# Altium PCB IMUBD-PCB-01.PcbDoc
Units mm, origin at the board's own origin, x right, y up, seen from the top; angles counter-clockwise.
Board outline 35.56 x 33.02 mm, 6 copper layers (Top Layer, MidLayer1, MidLayer2, MidLayer3, MidLayer4, Bottom Layer), stack 3.068 mm thick; 35 components, 24 nets, 116 pads, 27 vias.
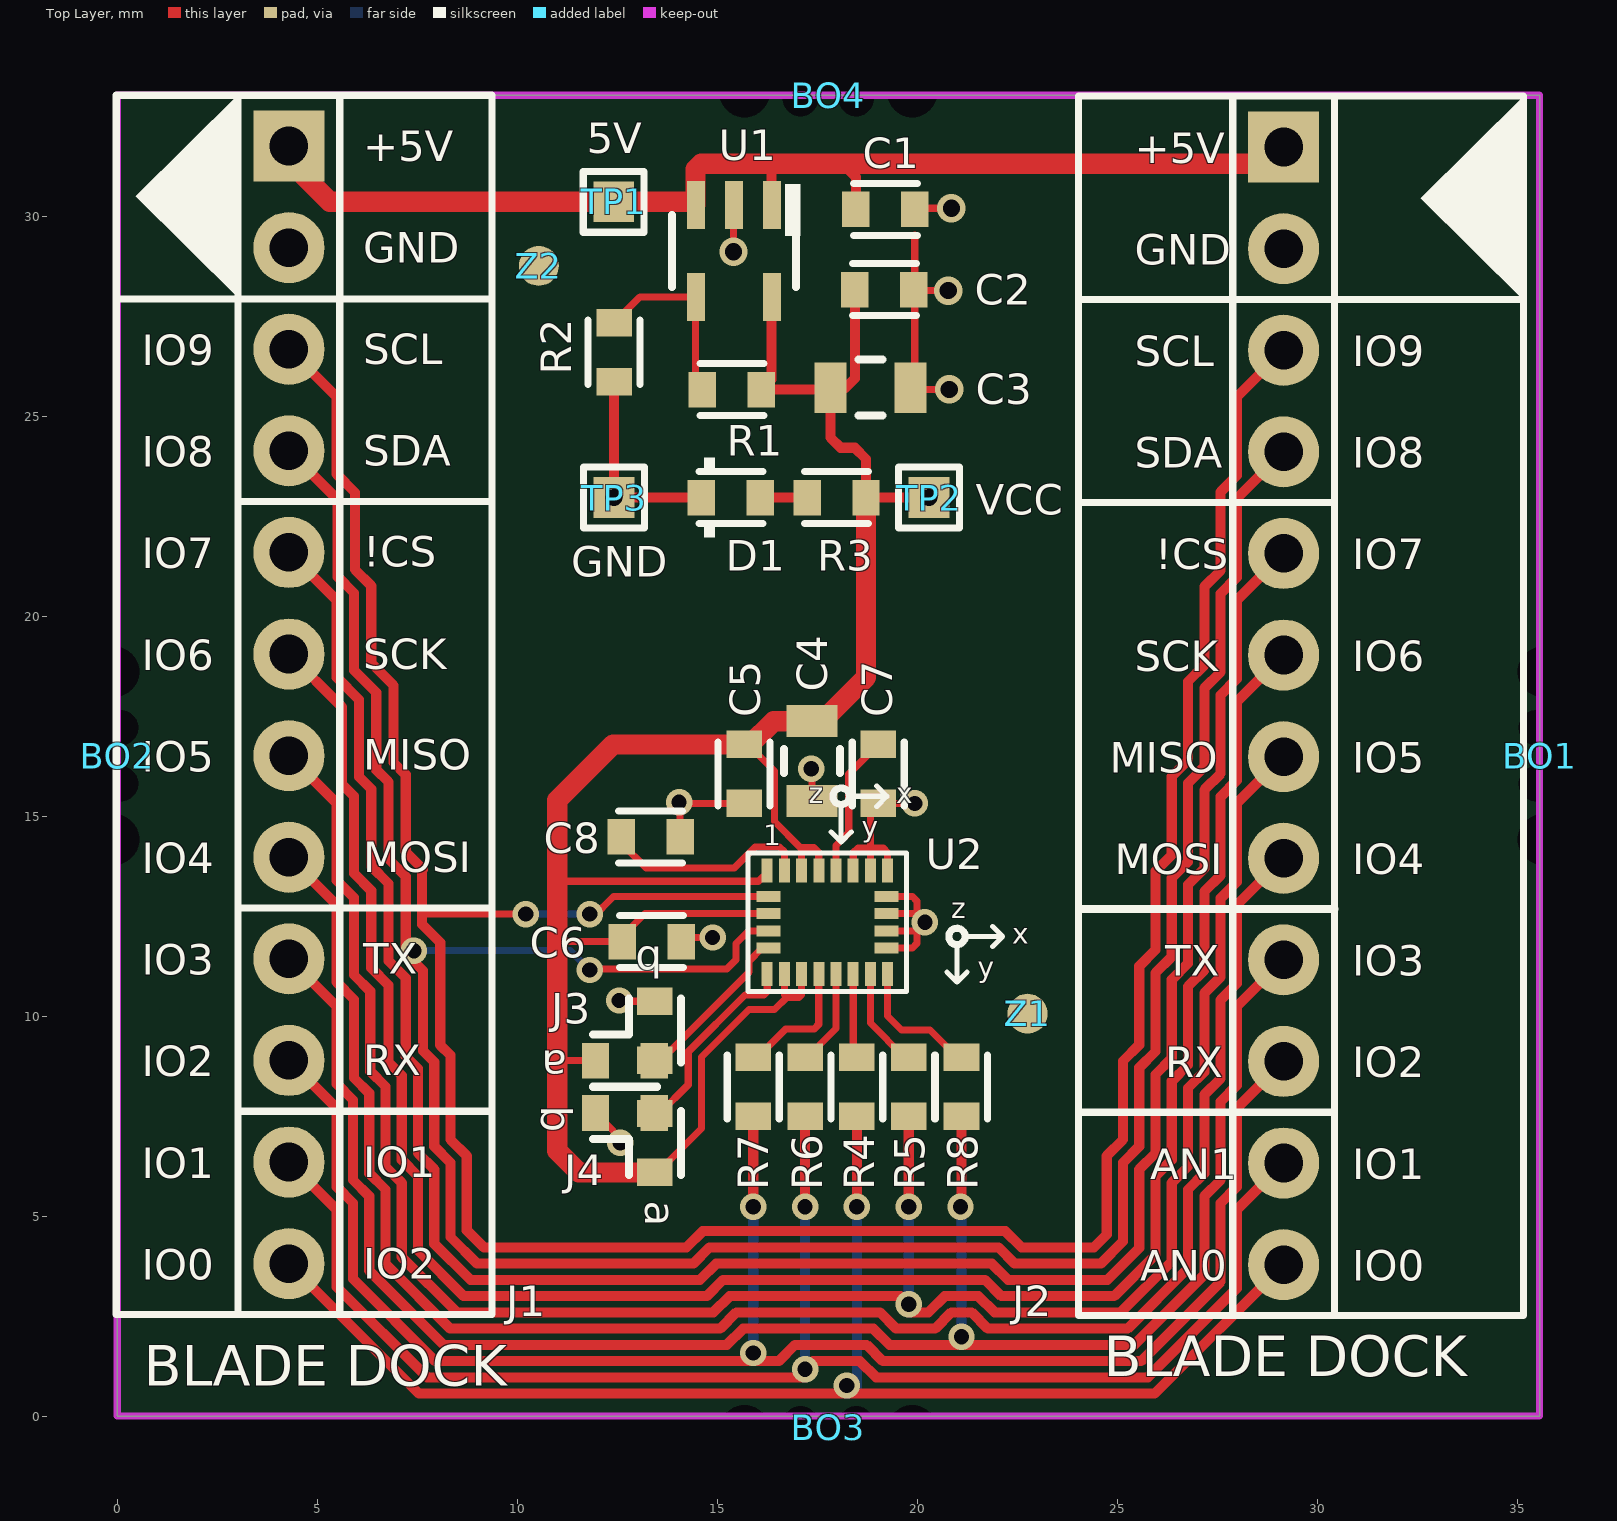
[diagram p0: Top Layer view]
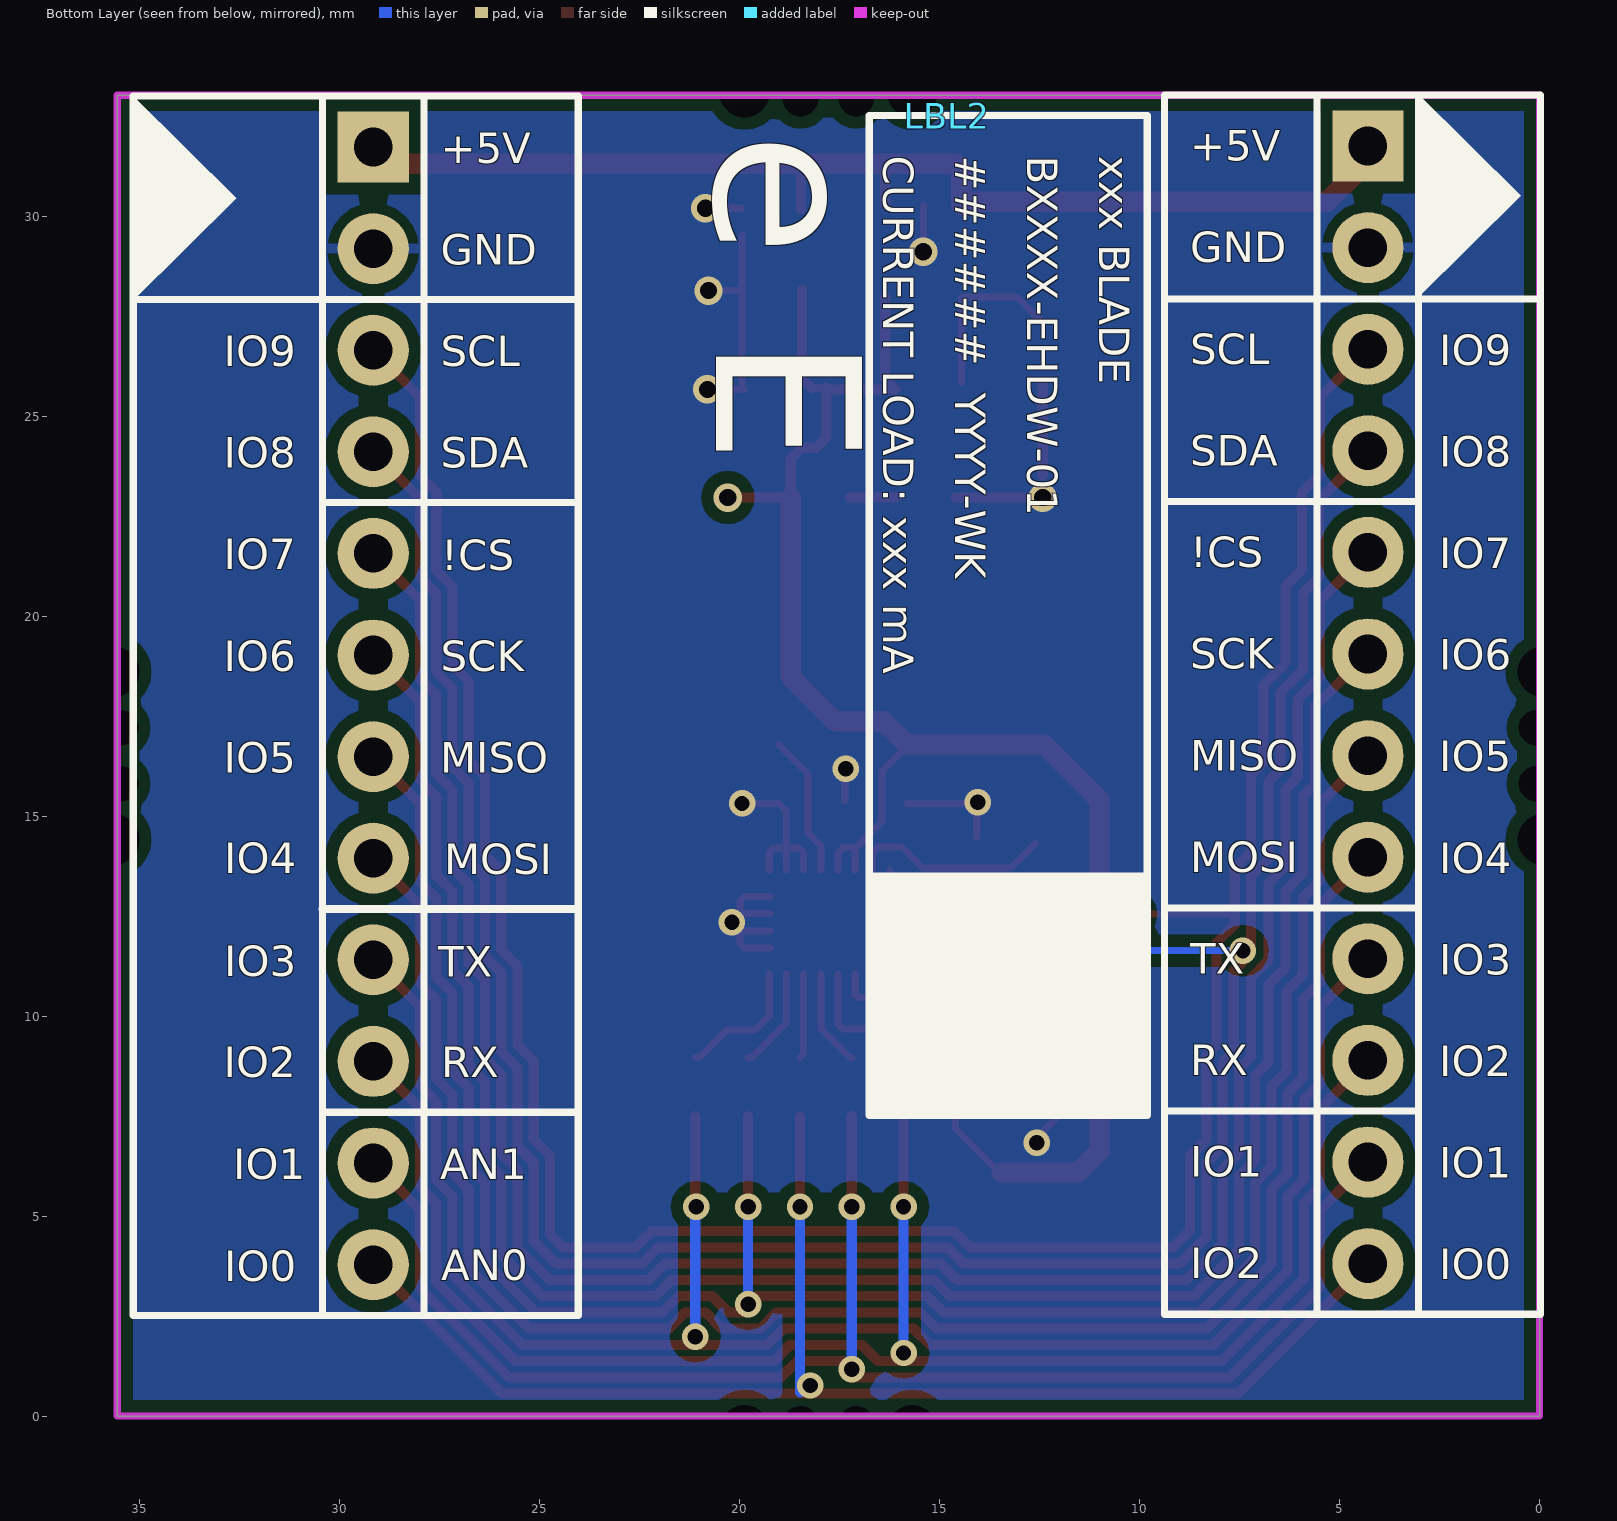
[diagram p1: Bottom Layer view, seen from below]
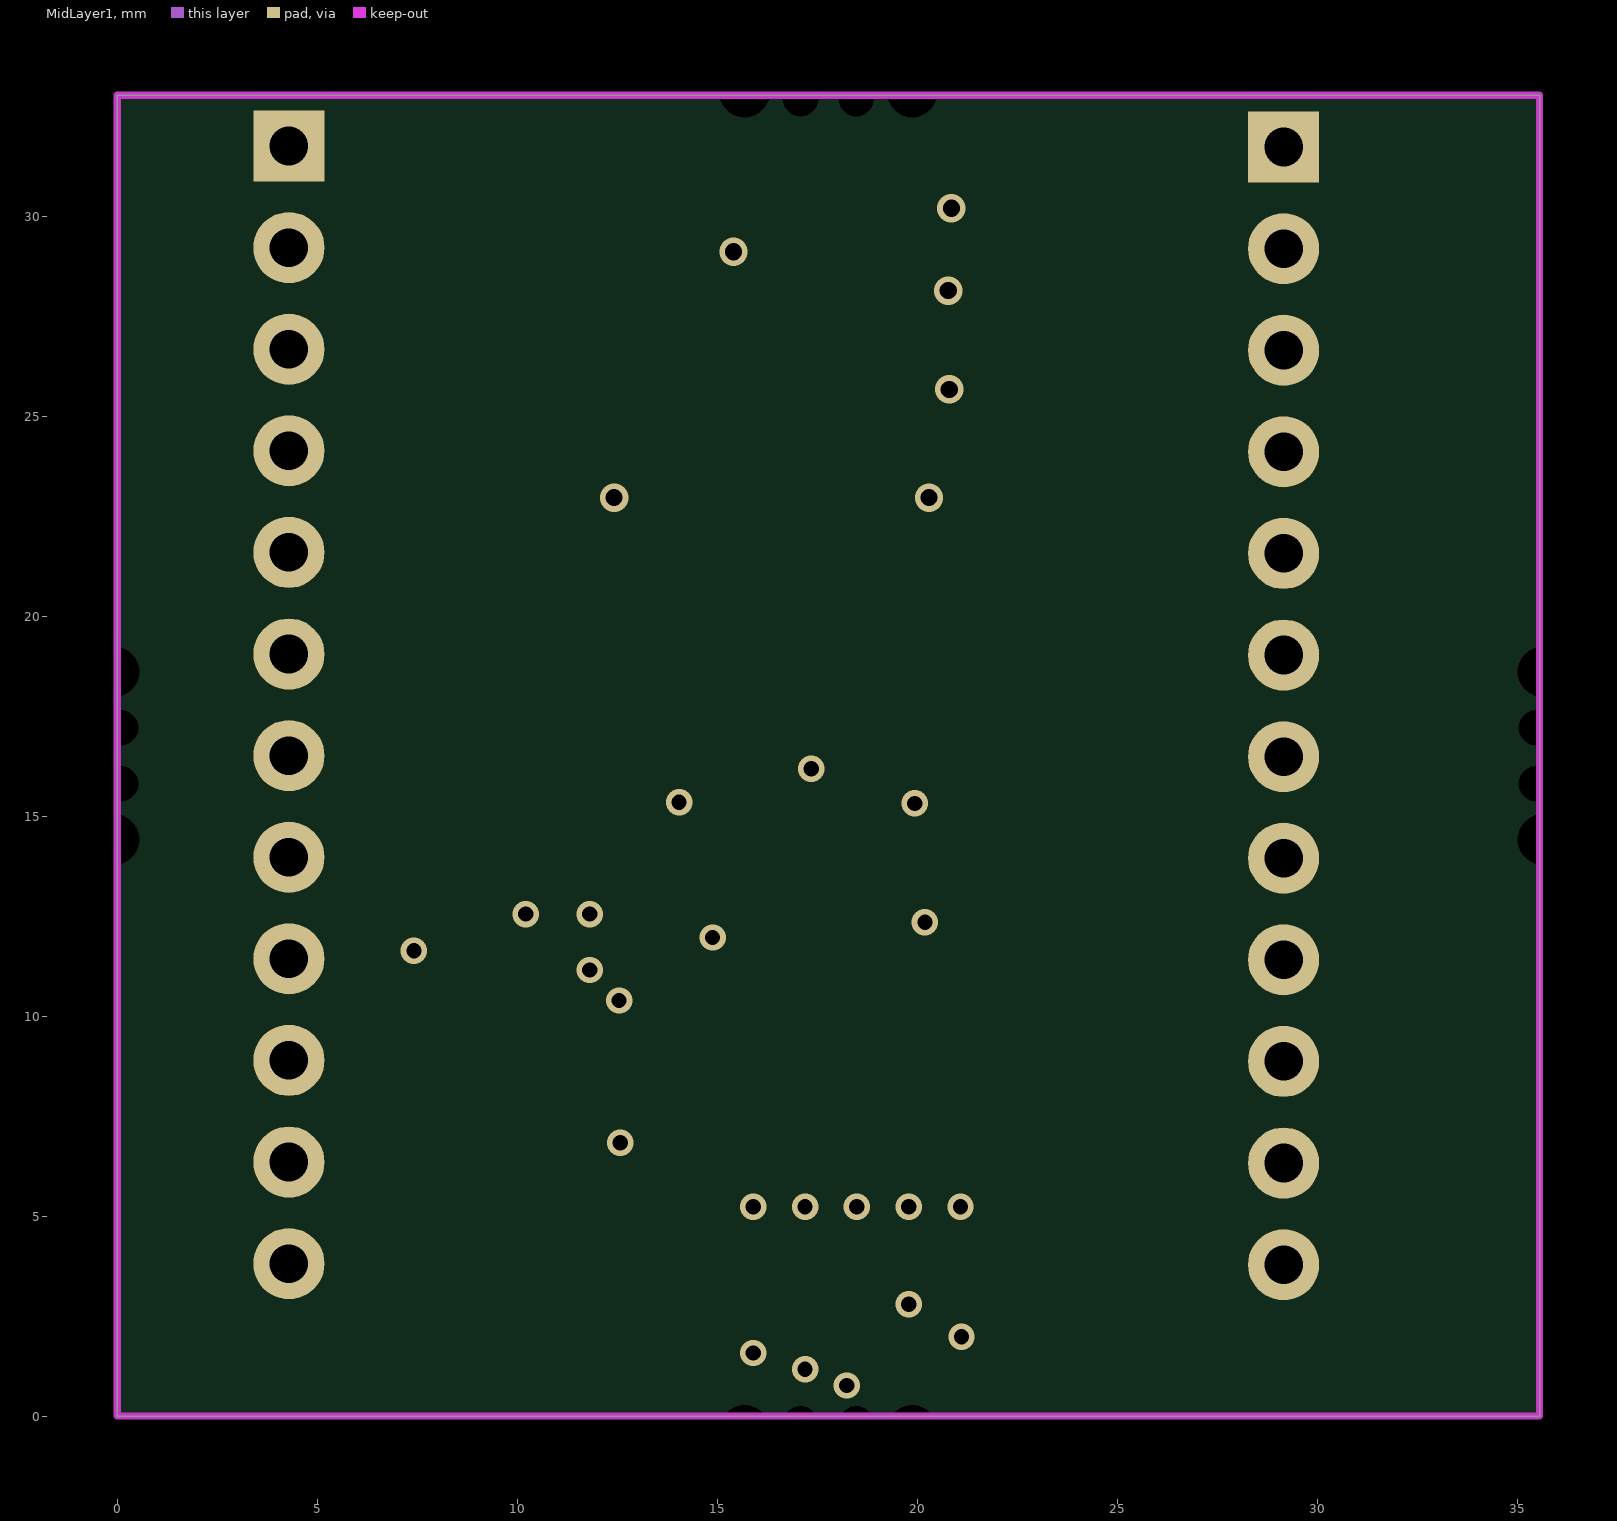
[diagram p2: MidLayer1]
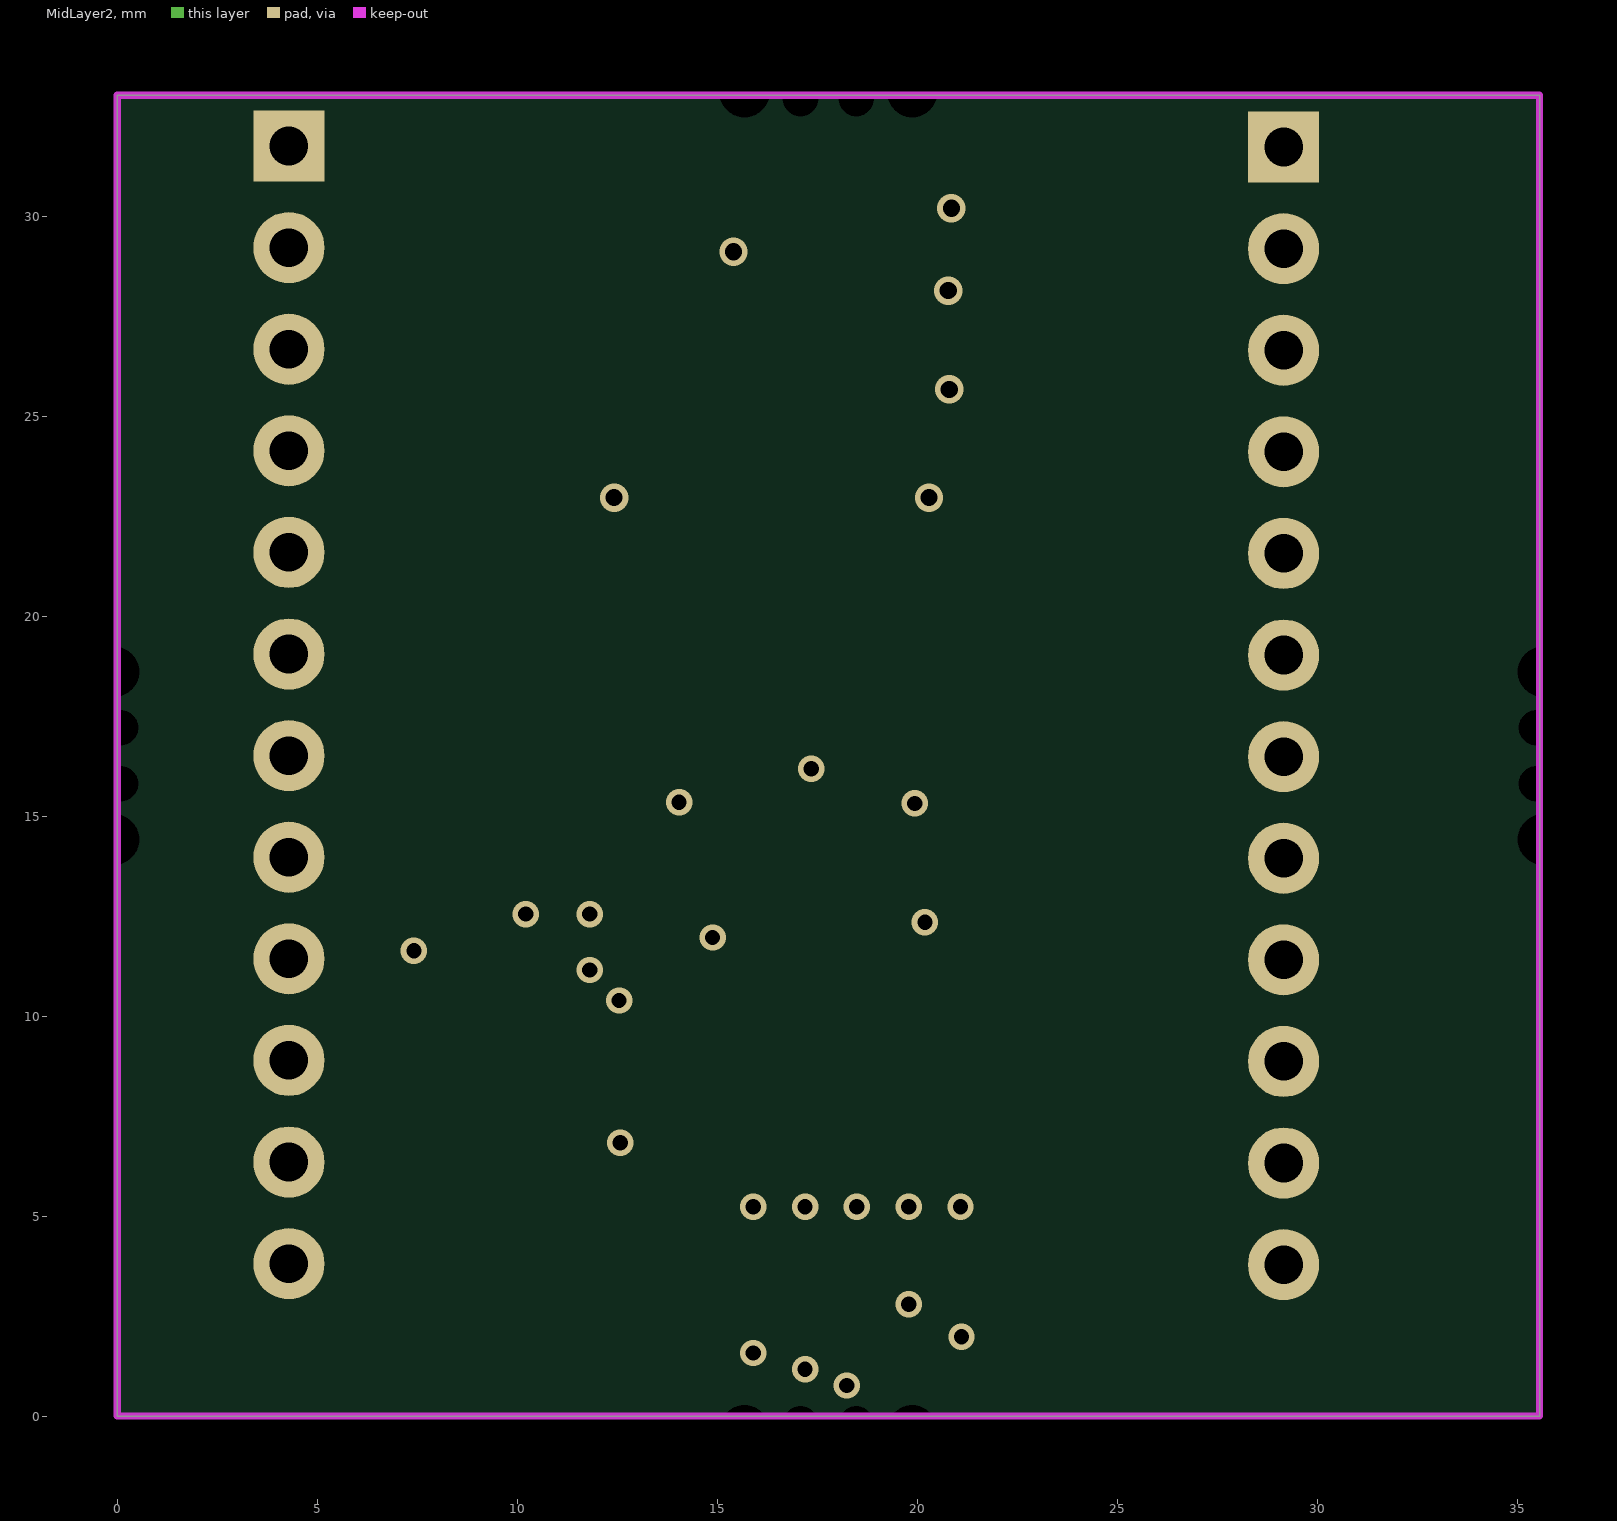
[diagram p3: MidLayer2]
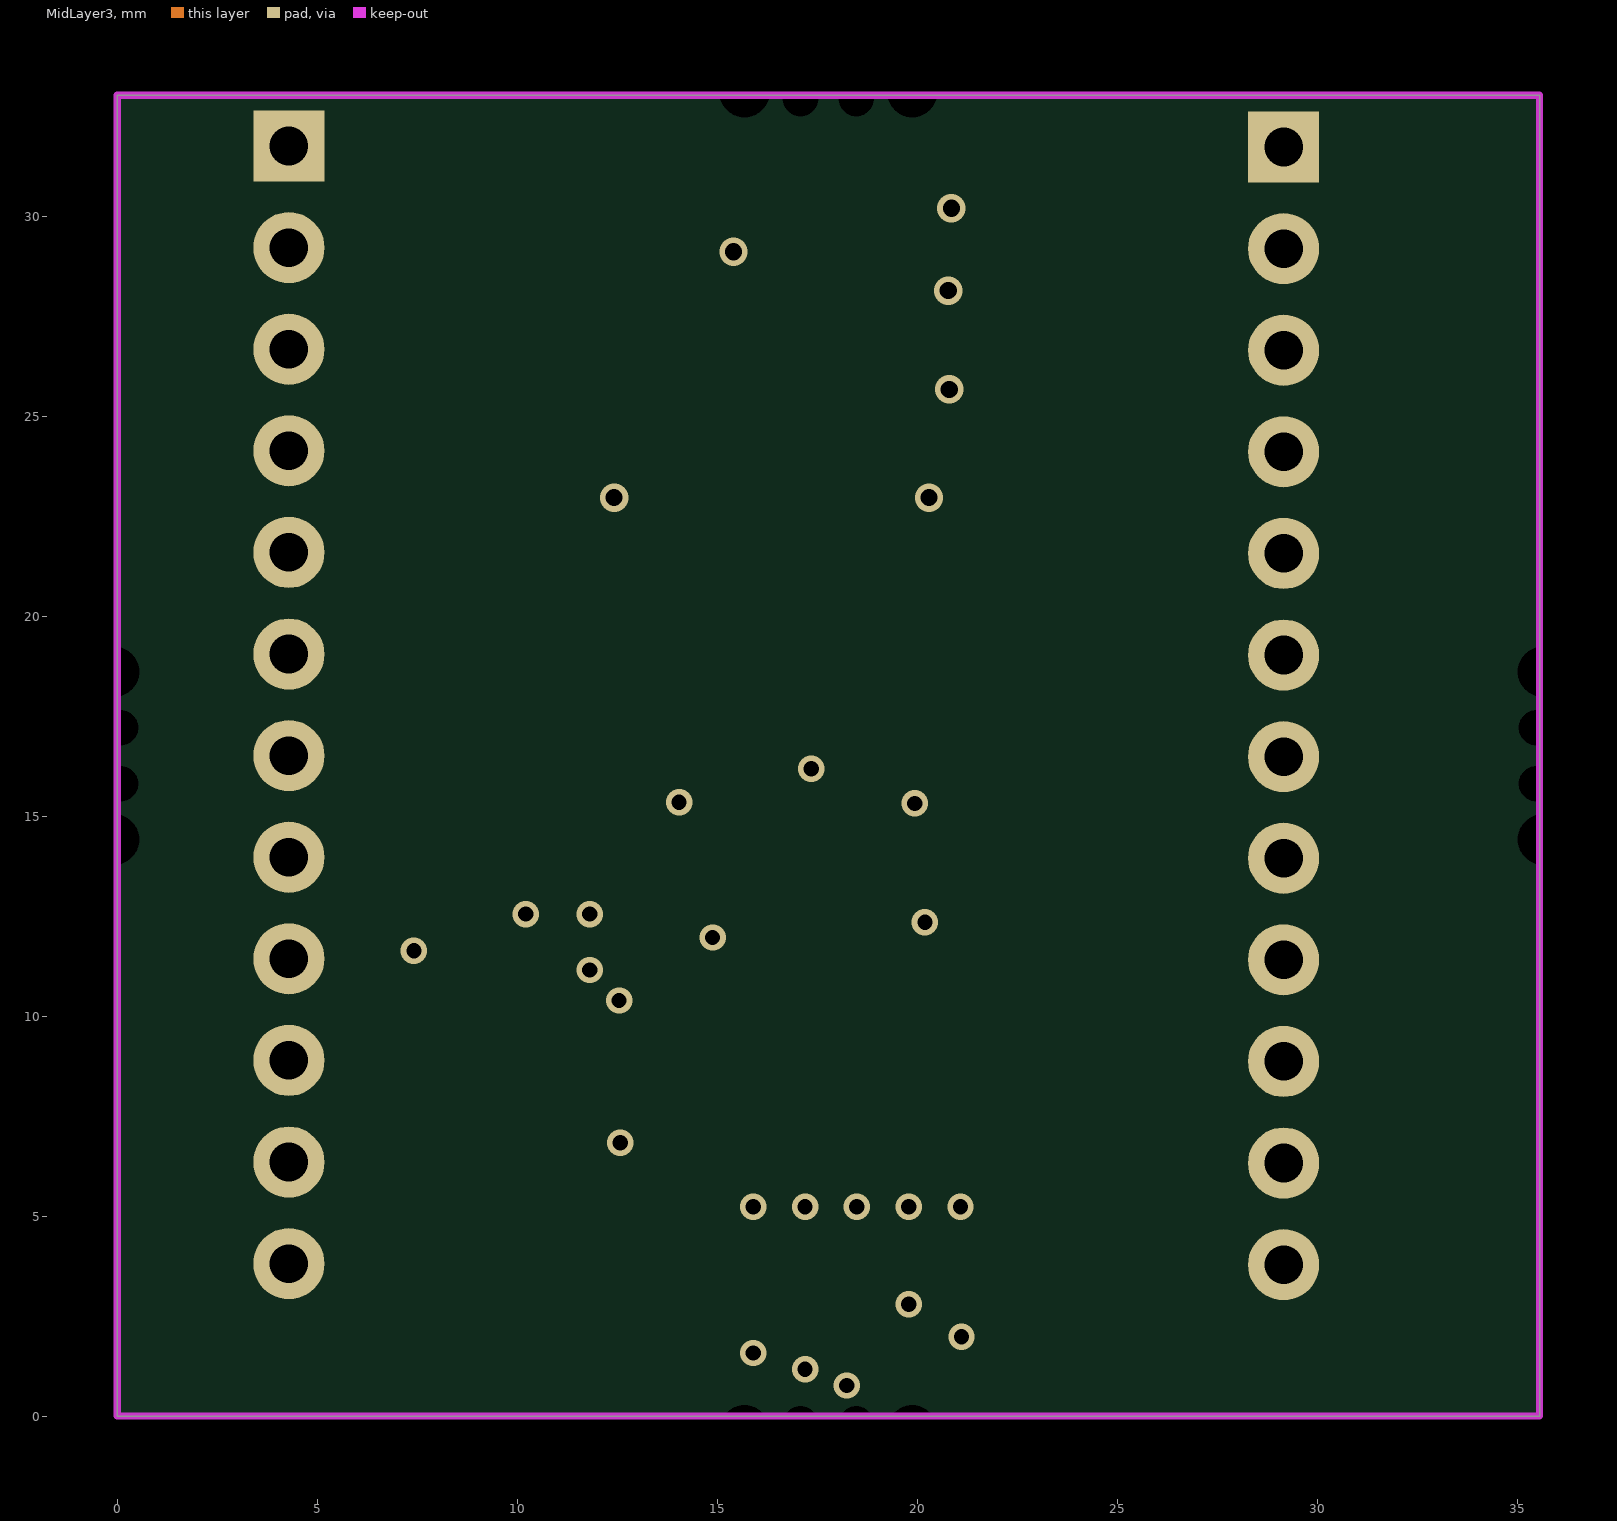
[diagram p4: MidLayer3]
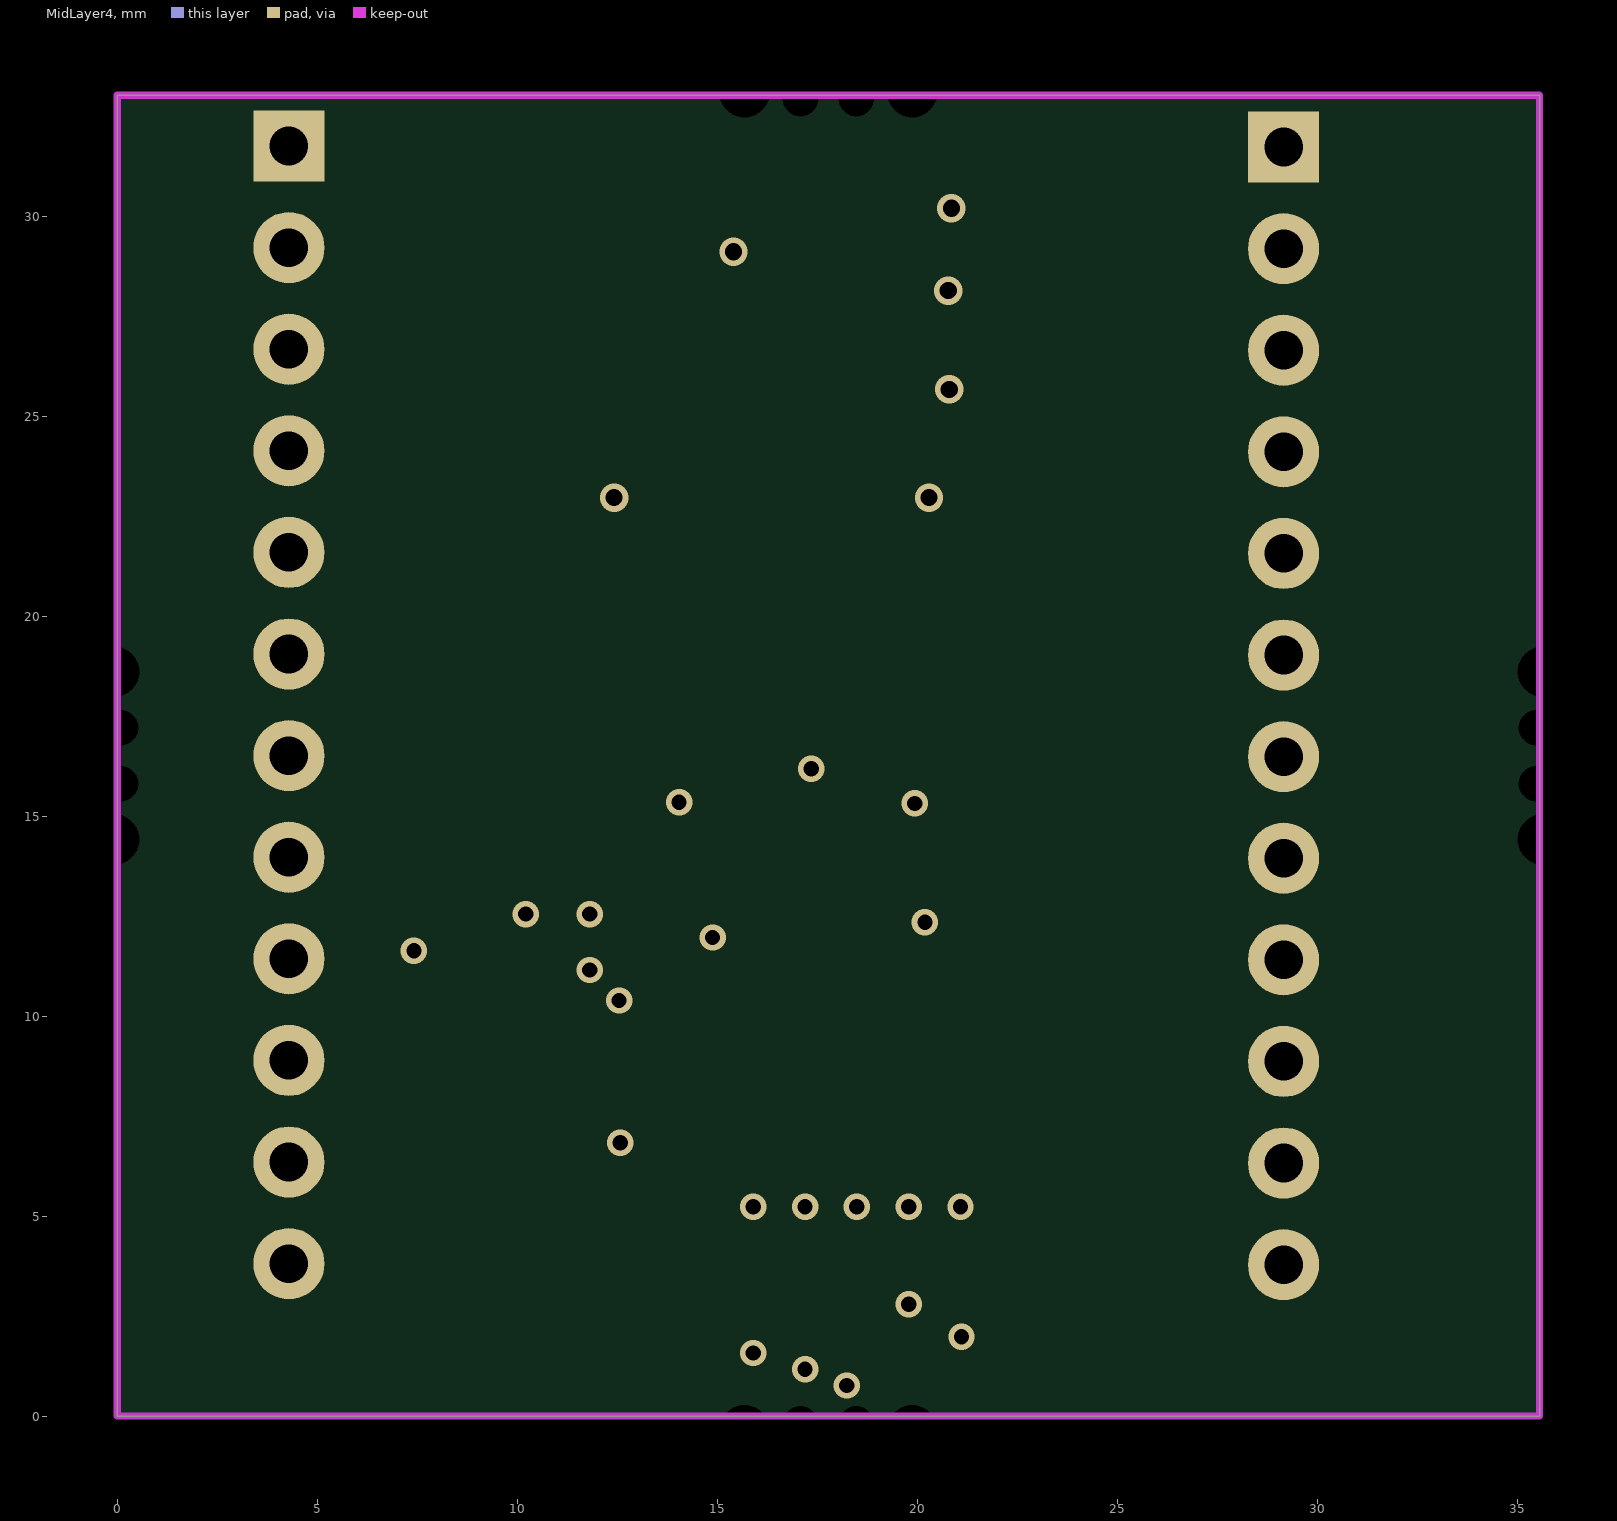
[diagram p5: MidLayer4]

## Layer stack, top to bottom
Top Solder: solder mask 0.0102, Solder Resist, Dk 3.5
Top Layer: signal copper 0.0356
Dielectric1: core 1.5748, FR-4, Dk 4.8
MidLayer1: signal copper 0.0356
Dielectric2: dielectric 0.32, FR-4, Dk 4.8
MidLayer2: signal copper 0.0356
Dielectric3: dielectric 0.32, FR-4, Dk 4.8
MidLayer3: signal copper 0.0356
Dielectric4: dielectric 0.32, FR-4, Dk 4.8
MidLayer4: signal copper 0.0356
Dielectric5: dielectric 0.32, FR-4, Dk 4.8
Bottom Layer: signal copper 0.0356
Bottom Solder: solder mask 0.0102, Solder Resist, Dk 3.5

## Board outline
0,0 0,33.02 35.56,33.02 35.56,0

## Design rules (kind name [scope] priority, off if disabled: settings)
Clearance "Clearance Polygon" [InPolygon] p1: gap=0.305 ignorepadtopadclearanceinfootprint=FALSE except(0: Arc-Hole Track-Hole SMDPad-Hole THPad-Hole Via-Hole Fill-Hole Poly-Hole Region-Hole Text-Hole)
Clearance [All] p2: gap=0.152 ignorepadtopadclearanceinfootprint=FALSE except(0: Arc-Hole Track-Hole SMDPad-Hole THPad-Hole Via-Hole Fill-Hole Poly-Hole Region-Hole Text-Hole)
FabricationTestPointUsage TestPointUsage [All] p1: valid=0 allowmultiple=FALSE
FabricationTestpoint Testpoint [All] p1: side=3 testpointundercomponent=TRUE minsize=1.016 maxsize=2.54 preferedsize=1.524 minholesize=0 maxholesize=1.016 preferedholesize=0.813 testpointgrid=0.025 allowsidetop=TRUE allowsidebottom=TRUE usegrid=TRUE gridtolerance=0
HoleSize [All] p1: absolutevalues=TRUE maxlimit=12.7 minlimit=0.254 maxpercent=80.000 minpercent=20.000
PolygonConnect "PolygonConnect Via" [All vs IsVia] p1: connectstyle=Direct reliefconductorwidth=0.254 reliefentries=4 polygonreliefangle="90 Angle" airgapwidth=0.254
PolygonConnect [All] p2: connectstyle=Relief reliefconductorwidth=0.254 reliefentries=4 polygonreliefangle="90 Angle" airgapwidth=0.254
RoutingVias [All] p1: holewidth=0.381 width=0.66 viastyle="Through Hole" minholewidth=0.254 minwidth=0.508 maxholewidth=5.08 maxwidth=12.7
SilkToSolderMaskClearance SilkscreenOverComponentPads [IsPad] p1: minsilkscreentomaskgap=0.254 clearancetoexposedcopper=TRUE
SolderMaskExpansion [All] p1: expansion=0.102
Width [All] p1: maxlimit=5.08 minlimit=0.152 preferedwidth=0.254 toplayer_prefwidth=0.178 midlayer1_maxwidth=0.254 midlayer2_maxwidth=0.254 midlayer3_maxwidth=0.254 midlayer4_maxwidth=0.254 minimp=50.000000 maximp=50.000000 favimp=50.000000
26 further rules are at their usual default settings.

## Components (designator, comment, footprint, x,y, rotation, side; value= is the part's Value field where it differs from the comment)
BO1 "BREAKOUT TAB" "BREAKOUT 4-HOLE 4MM" 35.56,16.51 r90 top
BO2 "BREAKOUT TAB" "BREAKOUT 4-HOLE 4MM" 0,16.51 r270 top
BO3 "BREAKOUT TAB" "BREAKOUT 4-HOLE 4MM" 17.78,-0.279 r0 top
BO4 "BREAKOUT TAB" "BREAKOUT 4-HOLE 4MM" 17.78,33.02 r180 top
C1 "1uF" 0603 19.203,30.165 r0 top
C2 "1uF" 0603 19.177,28.158 r0 top
C3 "10uF 0805" 0805 18.822,25.71 r0 top
C4 "10uF 0805 10V" 0805 17.374,16.383 r270 top
C5 "0.1uF" 0603 15.672,16.053 r270 top
C6 "0.1uF" 0603 13.36,11.862 r0 top
C7 "0.1uF" 0603 19.025,16.053 r270 top
C8 "0.1uF" 0603 13.335,14.478 r0 top
D1 "GREEN SMT" "0603 AK" 15.342,22.962 r180 top
J1 "BLADE Child" "HDR1X12 ENGENUICS CHILD" 4.293,17.78 r0 top locked
J2 "BLADE Parent" "HDR1X12 ENGENUICS PARENT" 29.159,17.755 r0 top locked
J3 "0Rb" "0603 SELECTOR" 12.7,9.627 r180 top
J4 "0Rb" "0603 SELECTOR" 12.7,6.833 r270 top
LBL1 "Active Layer Guide" "LABEL PCB ACTIVE LAYERS VERTICAL" -33.198,41.885 r0 top
LBL2 "PCB REV" "LABEL PCB REVISION BLADE" 14.808,32.512 r270 bottom
LBL4 "PCB TITLE BLOCK" "LABEL PCB TITLE BLOCK" 9.246,-13.741 r0 top
R1 "698k" 0603 15.367,25.659 r0 top
R2 "100k" 0603 12.421,26.595 r270 top
R3 "1.2k" 0603 17.983,22.962 r0 top
R4 "0R" 0603 18.491,8.23 r90 top
R5 "0R NNP" 0603 19.787,8.23 r90 top
R6 "0R" 0603 17.196,8.23 r90 top
R7 "0R NNP" 0603 15.9,8.23 r90 top
R8 "0R" 0603 21.107,8.23 r90 top
TP1 "5V" "TEST POINT SMT" 12.41,30.353 r90 top
TP2 "VCC" "TEST POINT SMT" 20.295,22.962 r270 top
TP3 "GND" "TEST POINT SMT" 12.421,22.962 r270 top
U1 "MCP1824" SOT23-5 15.418,29.124 r180 top
U2 "LSM9DS1" "LGA24 3.5 X 3MM LSM9DS1" 17.755,12.344 r0 top
Z1 "PCB" "FIDUCIAL PCB" 22.758,10.058 r0 top
Z2 "PCB" "FIDUCIAL PCB" 10.541,28.753 r0 top

## Footprints (in the part's own frame and the unit in brackets; to place one, negate y for a bottom-side part, rotate by r counter-clockwise, add the part's x,y. Pads: shape width x height; smd on the part's side, far side on the other; paste and mask are expansions set on the pad)
0603 [mil]
  rect 27x35 smd: 1(-29,0) 2(29,0)
  silkscreen extent -31,-26 31,26, body extent -33,-18 33,18, height 22
"0603 AK" [mil]
  rect 27x35 smd: A(-29,0) K(29,0)
  silkscreen extent -31,-39 31,39, body extent -33,-18 33,18, height 30
"0603 SELECTOR" [mil]
  rect 35x27 smd: 1(-29.26,28.74) 3(-29.26,-29.26)
  rect 27x35 smd: 1(-28.74,29.26) 2(29.26,29.26)
  silkscreen extent -55,-32 32,55, body extent -32,12 34,47, height 22
0805 [mm]
  rect 0.8x1.27 smd: 1(-0.99,-0.003) 2(1.011,-0.003)
  silkscreen extent -0.29,-0.7 0.31,0.7, body extent -1.05,-0.67 1.05,0.68, height 1.35
"BREAKOUT 4-HOLE 4MM" [mil]
  round 32 hole 50 unplated paste+0 mask+0: ""(-82.5,-3.25) ""(82.5,-3.25)
  round 32 hole 35 unplated paste+0 mask+0: ""(-27.5,3.25) ""(27.5,3.25)
"FIDUCIAL PCB" [mm]
  round 1 smd paste-2.54 mask+0.102: 1(0,0)
"HDR1X12 ENGENUICS CHILD" [mil]
  rect 70x70 hole 38: 1(0,550)
  round 70 hole 38: 2(0,450) 3(0,350) 4(0,250) 5(0,150) 6(0,50) 7(0,-50) 8(0,-150) 9(0,-250) 10(0,-350) 11(0,-450) 12(0,-550)
  silkscreen extent -170,-600 200,601, body extent -390,-600 13,600, height 95
"HDR1X12 ENGENUICS PARENT" [mil]
  rect 70x70 hole 38: 1(0,550)
  round 70 hole 38: 2(0,450) 3(0,350) 4(0,250) 5(0,150) 6(0,50) 7(0,-50) 8(0,-150) 9(0,-250) 10(0,-350) 11(0,-450) 12(0,-550)
  silkscreen extent -202,-600 236,600, body extent -8,-610 405,610, height 108
"LABEL PCB ACTIVE LAYERS VERTICAL" [mm]
"LABEL PCB REVISION BLADE" [mm]
  silkscreen extent 0,-1.95 25,5
"LABEL PCB TITLE BLOCK" [mm]
"LGA24 3.5 X 3MM LSM9DS1" [mm]
  rect 0.275x0.6 smd paste-0.04 mask+0.03: 1(-1.505,1.296) 6(-1.505,-1.294) 7(-1.075,-1.294) 8(-0.645,-1.294) 9(-0.215,-1.294) 10(0.215,-1.294) 11(0.645,-1.294) 12(1.075,-1.294) 13(1.505,-1.294) 18(1.505,1.296) 19(1.075,1.296) 20(0.645,1.296) 21(0.215,1.296) 22(-0.215,1.296) 23(-0.645,1.296) 24(-1.075,1.296)
  rect 0.6x0.275 smd paste-0.04 mask+0.03: 2(-1.475,0.645) 3(-1.475,0.215) 4(-1.475,-0.215) 5(-1.475,-0.645) 14(1.475,-0.645) 15(1.475,-0.215) 16(1.475,0.215) 17(1.475,0.645)
  silkscreen extent -1.98,-1.73 1.98,3.4, body extent -1.83,-1.58 1.83,1.58, height 1.28
SOT23-5 [mm]
  rect 0.45x1.2 smd: 1(-0.95,-1.15) 2(0,-1.15) 3(0.95,-1.15) 4(0.95,1.15) 5(-0.95,1.15)
  silkscreen extent -1.66,-1.67 1.55,0.9, body extent -1.55,-1.6 1.55,1.6, height 1.5
"TEST POINT SMT" [mil]
  rect 40x40 smd paste-3937.01: 1(0,0)
  silkscreen extent -30,-30 30,30

## Part data
C1 C2 C3 C4 C5 C6 C7 C8: library part "CAPACITOR NON-POLARIZED"
D1: library part "LED T1-3/4", "LED"
J1: library part "CONN ENGENUICS BLADE CHILD"
J2: library part "CONN ENGENUICS BLADE PARENT"
J3 J4: library part "SWITCH RESISTOR SELECTOR"
LBL1: library part "LABEL PCB ACTIVE LAYERS"
LBL2: library part "LABEL PCB REVISION"
LBL4: library part "LABEL PCB TITLE BLOCK"
R1 R2 R3 R4 R5 R6 R7 R8: library part RESISTOR
TP1 TP2 TP3: library part "TEST POINT SMT"
U1: library part "VREG MCP1824"
U2: library part "IC IMU ST LSM9DS1"
Z1 Z2: library part "FIDUCIAL PCB"

## Via types
v1: diameter 0.66, hole 0.381, Top Layer to Bottom Layer, tented both sides, 21 vias
v2: diameter 0.711, hole 0.432, Top Layer to Bottom Layer, tented both sides, 6 vias

## Nets (pads, with @x,y where several pads share a name; then routed paths per layer and width w, separated by ;. In a path a pad name is that pad's centre, name@x,y a point inside that pad or via, vN(x,y) a via of type N, cw(c..) or ccw(c..) an arc to the next point about the centre after c; other vN are vias at no path point)
!CS/IO7: J1.5 J2.5 | length 56.3
  Top Layer w0.254: J1.5 5.486,20.396 5.486,18.467 6.045,17.908 6.045,15.979 6.35,15.674 6.35,13.745 6.782,13.313 6.782,11.383 7.214,10.952 7.214,8.986 7.518,8.682 7.518,6.573 7.925,6.166 7.925,4.309 8.83,3.404 14.568,3.404 14.975,3.81 21.865,3.81 22.271,3.404 24.755,3.404 25.552,4.201 25.552,6.166 25.959,6.573 25.959,8.538 26.365,8.944 26.365,10.91 26.772,11.316 26.772,13.281 27.178,13.688 27.178,15.653 27.584,16.059 27.584,18.025 27.991,18.431 27.991,20.396 J2.5
+5V: C1.1 J1.1 J2.1 TP1.1 U1.1 U1.3 | length 28.2
  Top Layer w0.178: U1.3@14.381,30.353 U1.3@14.458,30.277
  Top Layer w0.254: U1.1@16.358,30.277 16.358,31.191 ; 18.187,31.257 18.466,30.978 C1.1
  Top Layer w0.508: J1.1@4.521,31.14 5.308,30.353 TP1.1 U1.3@14.381,30.353 ; U1.3@14.458,30.277 14.458,31.171 14.595,31.309 28.743,31.309 J2.1
AN0/IO0: J1.12 J2.12 R4.1 | length 34.5
  Top Layer w0.254: J1.12 7.544,0.559 v1@18.491,0.559 ; v1@18.491,0.584 v1@18.491,0.559 ; v1(18.491,5.232) R4.1 ; J2.12 25.933,0.559 v1@18.491,0.559
  Bottom Layer w0.254: v1@18.491,0.584 v1(18.491,5.232)
  other v1: 18.237,0.762
AN1/IO1: J1.11 J2.11 R6.1 | length 38.2
  Top Layer w0.254: J1.11 5.486,5.156 5.486,3.227 7.748,0.965 v1@17.196,0.965 ; v1(17.196,1.168) 17.399,1.372 18.566,1.372 18.972,0.965 25.765,0.965 27.991,3.191 27.991,5.156 J2.11 ; v1(17.196,5.232) R6.1
  Bottom Layer w0.254: v1(17.196,1.168) v1(17.196,5.232)
DEN_AG: R8.2 U2.13 | length 3.3
  Top Layer w0.178: U2.13 19.26,10.001 19.609,9.652 20.32,9.652 21.006,8.966 R8.2
DRDY_M: R7.2 U2.9 | length 3.2
  Top Layer w0.178: R7.2 16.002,8.966 16.713,9.677 17.424,9.677 17.54,9.793 U2.9
GND: C1.2 C2.2 C3.2 C4.2 C5.2 C6.2 C7.2 C8.2 D1.K J1.2 J2.2 J3.3 J4.3 R2.2 TP3.1 U1.2 U2.14 U2.15 U2.16 U2.17 U2.18 U2.19 U2.20 | length 26.5
  Top Layer w0.178: J4.3 12.395,7.137 ; v1@12.566,10.37 J3.3 ; J3.3@13.57,10.37 J3.3@13.577,10.363 ; C8.2 14.072,15.316 C5.2@15.824,15.316 ; C6.2@14.199,11.963 v1(14.884,11.963) ; v2(15.408,29.109) U1.2@15.408,30.277 ; v1(17.348,16.18) 17.37,16.158 C4.2 ; U2.20@18.4,13.65 18.4,14.082 18.517,14.199 18.83,14.199 ; U2.19@18.83,13.65 18.83,14.199 ; U2.14 19.878,11.699 19.99,11.811 v1@19.99,12.344 ; U2.15 v1@19.978,12.129 ; U2.16 v1@19.978,12.559 ; U2.17 19.878,12.989 19.99,12.878 v1@19.99,12.344 ; U2.18@19.26,13.65 19.26,14.091 19.152,14.199 18.83,14.199 ; C3.2@19.876,25.664 v2(20.804,25.664) ; C2.2@19.935,28.137 v2(20.779,28.137) ; v1(19.939,15.316) C7.2 18.83,15.121 18.83,14.199 ; C3.2@19.939,25.814 19.939,29.52 ; C1.2@19.969,30.195 v2(20.855,30.195) ; v1(20.193,12.344) v1@19.99,12.344
  Top Layer w0.254: v2(12.421,22.962) D1.K ; 12.421,23.511 R2.2
  other v1: 12.573,6.833 12.548,10.389 14.046,15.342
INT1_AG: R4.2 U2.11 | length 2.1
  Top Layer w0.178: U2.11 18.4,9.058 R4.2
INT2_AG: R5.2 U2.12 | length 2.5
  Top Layer w0.178: U2.12 18.83,9.822 19.685,8.966 R5.2
INT_M: R6.2 U2.10 | length 2.4
  Top Layer w0.178: R6.2 17.247,8.966 17.97,9.689 U2.10
MISO/IO5: J1.7 J2.7 R5.1 | length 53.1
  Top Layer w0.254: J1.7 5.486,15.316 5.486,13.387 5.918,12.955 5.918,11.026 6.325,10.619 6.325,8.618 6.706,8.237 6.706,6.236 7.112,5.83 7.112,3.972 8.493,2.591 14.905,2.591 15.311,2.997 19.583,2.997 v1(19.787,2.794) ; v1@19.787,2.591 20.28,2.591 20.687,2.997 21.528,2.997 21.935,2.591 25.092,2.591 26.365,3.864 26.365,5.83 26.772,6.236 26.772,8.201 27.178,8.608 27.178,10.573 27.584,10.979 27.584,12.945 27.991,13.351 27.991,15.316 J2.7 ; v1(19.787,5.232) R5.1
  Bottom Layer w0.254: v1(19.787,2.794) v1(19.787,5.232)
MOSI/IO4: J1.8 J2.8 | length 44.4
  Top Layer w0.254: J1.8 5.486,12.776 5.486,10.847 5.918,10.415 5.918,8.45 6.299,8.069 6.299,6.068 6.706,5.661 6.706,3.804 8.325,2.184 15.073,2.184 15.48,2.591 19.071,2.591 19.477,2.184 20.448,2.184 20.855,2.591 21.36,2.591 21.766,2.184 25.26,2.184 26.772,3.696 26.772,5.661 27.178,6.068 27.178,8.033 27.584,8.439 27.584,10.405 27.991,10.811 27.991,12.776 J2.8
NetC7_1: C7.1 U2.21 | length 3.6
  Top Layer w0.178: U2.21@17.97,13.65 17.97,14.261 18.288,14.58 18.288,16.053 C7.1
NetC8_1: C8.1 U2.24 | length 5.1
  Top Layer w0.178: C8.1@12.598,14.326 13.226,13.698 15.426,13.698 15.951,14.224 16.561,14.224 16.68,14.105 U2.24@16.68,13.65
NetD1_A: D1.A R3.1 | length 1.2
  Top Layer w0.254: D1.A R3.1
NetJ3_1: J3.1 U2.5 | length 4.2
  Top Layer w0.178: J3.1@13.43,8.883 13.582,8.883 15.799,11.1 15.799,11.378 16.12,11.699 U2.5
NetJ4_1: J4.1 U2.6 | length 5
  Top Layer w0.178: J4.1@13.43,7.576 13.57,7.576 14.275,8.28 14.275,9.109 15.694,10.528 16.167,10.528 16.25,10.611 U2.6
NetR1_1: R1.1 R2.1 U1.4 | length 4.4
  Top Layer w0.178: R2.1 13.065,27.977 14.458,27.977 14.458,27.332 R1.1@14.458,25.832
SCK/IO6: J1.6 J2.6 | length 52.2
  Top Layer w0.254: J1.6 5.613,17.729 5.613,15.8 5.918,15.495 5.918,13.566 6.35,13.134 6.35,11.205 6.782,10.773 6.782,8.843 7.112,8.513 7.112,6.404 7.518,5.998 7.518,4.14 8.662,2.997 14.736,2.997 15.143,3.404 21.697,3.404 22.103,2.997 24.923,2.997 25.959,4.033 25.959,5.998 26.365,6.404 26.365,8.37 26.772,8.776 26.772,10.741 27.178,11.148 27.178,13.113 27.584,13.519 27.584,15.485 27.991,15.891 27.991,17.856 J2.6
SCL/IO9: J1.3 J2.3 U2.2 | length 73.3
  Top Layer w0.178: 7.671,12.548 v1(10.211,12.548) ; v1(11.811,12.548) 11.887,12.471 12.405,12.989 U2.2
  Top Layer w0.254: J1.3 5.486,25.476 5.486,23.547 5.944,23.09 5.944,21.16 6.35,20.754 6.35,18.825 6.909,18.266 6.909,16.336 7.214,16.032 7.214,14.102 7.645,13.67 7.62,13.645 7.62,12.294 8.077,11.836 8.077,9.272 8.331,9.018 8.331,6.909 8.738,6.503 8.738,4.645 9.167,4.216 14.231,4.216 14.638,4.623 22.202,4.623 22.608,4.216 24.418,4.216 24.74,4.538 24.74,6.503 25.146,6.909 25.146,8.875 25.552,9.281 25.552,11.246 25.959,11.653 25.959,13.618 26.365,14.024 26.365,15.99 26.772,16.396 26.772,18.361 27.178,18.768 27.178,20.733 27.584,21.139 27.584,23.105 27.991,23.511 27.991,25.476 J2.3
  Bottom Layer w0.178: v1(10.211,12.548) v1(11.811,12.548)
SDA/IO8: J1.4 J2.4 U2.4 | length 70.1
  Top Layer w0.178: v1(11.811,11.151) 11.786,11.176 15.24,11.176 15.469,11.405 15.469,11.811 15.787,12.129 U2.4
  Top Layer w0.254: J1.4 5.512,22.911 5.512,20.981 5.918,20.575 5.918,18.646 6.477,18.087 6.477,16.158 6.782,15.853 6.782,13.923 7.214,13.492 7.214,11.562 7.645,11.13 7.645,9.129 7.925,8.85 7.925,6.741 8.331,6.335 8.331,4.477 8.998,3.81 14.4,3.81 14.806,4.216 22.033,4.216 22.44,3.81 24.587,3.81 25.146,4.369 25.146,6.335 25.552,6.741 25.552,8.706 25.959,9.113 25.959,11.078 26.365,11.484 26.365,13.45 26.772,13.856 26.772,15.821 27.178,16.228 27.178,18.193 27.584,18.599 27.584,20.565 27.991,20.971 27.991,22.936 J2.4
  Bottom Layer w0.178: v1(7.417,11.633) 11.328,11.633 v1(11.811,11.151)
URX/IO2: J1.10 J2.10 R7.1 | length 41.9
  Top Layer w0.254: J1.10 5.486,7.696 5.486,5.731 5.893,5.325 5.893,3.431 7.952,1.372 16.537,1.372 16.943,1.778 18.734,1.778 19.141,1.372 25.597,1.372 27.584,3.359 27.584,5.325 27.991,5.731 27.991,7.696 J2.10 ; v1(15.9,5.232) R7.1
  Bottom Layer w0.254: v1(15.9,1.575) v1(15.9,5.232)
UTX/IO3: J1.9 J2.9 R8.1 | length 45.5
  Top Layer w0.254: J1.9 5.486,10.236 5.486,8.307 5.893,7.9 5.893,5.899 6.299,5.493 6.299,3.635 8.157,1.778 15.241,1.778 15.648,2.184 18.903,2.184 19.309,1.778 25.428,1.778 27.178,3.528 27.178,5.493 27.584,5.899 27.584,7.865 27.991,8.271 27.991,10.236 J2.9 ; v1@21.107,5.258 R8.1
  Bottom Layer w0.254: v1(21.107,1.981) v1@21.107,5.232
  other v1: 21.082,5.232
VCC: C2.1 C3.1 C4.1 C5.1 C6.1 J3.2 J4.2 R1.2 R3.2 TP2.1 U1.5 U2.1 U2.3 U2.7 U2.8 U2.22 U2.23 | length 61.8
  Top Layer w0.178: 10.998,13.32 11.047,13.368 16.035,13.368 16.25,13.583 U2.1@16.25,13.65 ; 11.005,8.883 J3.2 ; 11.024,11.862 C6.1 ; C6.1@12.624,11.989 13.194,12.559 U2.3 ; J4.2 13.506,6.089 14.605,7.188 14.605,8.972 15.793,10.16 16.434,10.16 16.739,10.465 ; C5.1 15.773,16.789 16.434,16.129 16.434,14.859 17.084,14.209 17.11,14.209 ; U2.7 16.68,10.524 16.739,10.465 ; U2.8 17.11,10.531 17.043,10.465 16.739,10.465 ; U2.23@17.11,13.65 17.11,14.209 ; U2.22@17.54,13.65 17.54,14.083 17.414,14.209 17.11,14.209 ; C3.1 C3.1@18.209,25.707
  Top Layer w0.254: U1.5@16.358,27.977 16.358,25.913 R1.2 17.785,25.659 C3.1 17.832,24.459 18.085,24.206 18.44,24.206 18.72,23.927 R3.2 v2(20.295,22.962) 19.603,22.962 ; C3.1@18.209,25.707 18.441,25.939 C2.1
  Top Layer w0.508: J4.2 11.538,6.089 10.998,6.629 10.998,13.32 10.998,15.392 12.395,16.789 C5.1 ; C5.1@15.773,16.789 15.824,16.789 16.407,17.373 C4.1 17.627,17.373 18.72,18.466 R3.2
pads on no net: BO1. BO2. BO3. BO4. Z1.1 Z2.1

## Polygon pours and split planes (outlines as drawn)
GND on Bottom Layer "Top Layer-No Net" (solid, remove dead copper, pour order 2): 0,33.02 35.56,33.02 35.56,0 0,0

## Keep-outs
Keep-Out Layer:
  the board outline again, w0.178

## Other copper
Top Layer:
  pour cut-out: 17.869,30.863 19.599,30.887 19.599,29.464 17.869,29.466
  pour cut-out: 17.844,28.212 18.176,28.21 19.787,28.212 19.705,24.818 18.221,24.818 17.844,26.815
  pour cut-out: 11.722,27.929 13.119,27.929 13.119,25.262 11.722,25.262
  pour cut-out: 14.034,24.961 16.701,24.961 17.178,24.818 17.178,26.596 14.036,26.61

## Silkscreen, mask and mechanical layers (free items; w line width, h text height)
Top Overlay:
  circle w0.178: c20.994,11.989 r0.205
  lines w0.127: 20.74,11.1 20.994,10.846 ; 20.994,11.784 20.994,10.846 ; 21.199,11.989 22.137,11.989 ; 21.248,11.1 20.994,10.846 ; 21.883,11.735 22.137,11.989 ; 21.883,12.243 22.137,11.989
  text "z" at 20.853,12.446 h0.51
  text "x" at 22.377,11.811 h0.51
  text "y" at 21.514,10.973 h0.51
  text "BLADE DOCK" at 0.66,0.762 h1.02
Bottom Overlay:
  text "e" at 21.819,32.08 h6.35 r90
  text "E" at 21.793,26.975 h6.35 r90
Mechanical 1:
  the board outline again, w0.178
Mechanical 2:
  text "IMU BLADE BOARD" at 6.147,-8.28 h1.02
  text "IMUBD-PCB" at 6.147,-11.252 h1.02
  text "01" at 6.147,-14.249 h1.02
  text "2019-02-18" at 6.147,-17.272 h1.02
  text "JRL" at 6.147,-20.269 h1.02

## Dimensions
0,33.02 to 35.56,33.02 on Mechanical 5
35.56,33.02 to 35.56,0 on Mechanical 5

## Text inside footprints (layer, text, board x,y; h text height)
J1: Top Overlay "IO9" at 0.61,26.27 h0.76; Top Overlay "IO8" at 0.61,23.73 h0.76; Top Overlay "IO7" at 0.61,21.19 h0.76; Top Overlay "IO6" at 0.61,18.65 h0.76; Top Overlay "IO5" at 0.61,16.11 h0.76; Top Overlay "IO4" at 0.61,13.57 h0.76; Top Overlay "IO3" at 0.61,11.03 h0.76; Top Overlay "IO2" at 0.61,8.49 h0.76; Top Overlay "IO1" at 0.61,5.95 h0.76; Top Overlay "IO0" at 0.61,3.41 h0.76; Top Overlay "MISO" at 6.147,16.154 h0.76; Top Overlay "MOSI" at 6.147,13.595 h0.76; Top Overlay "SDA" at 6.147,23.755 h0.76; Top Overlay "SCL" at 6.147,26.295 h0.76; Top Overlay "+5V" at 6.147,31.375 h0.76; Top Overlay "GND" at 6.147,28.835 h0.76; Top Overlay "SCK" at 6.147,18.675 h0.76; Top Overlay "IO2" at 6.147,3.435 h0.76; Top Overlay "IO1" at 6.147,5.975 h0.76; Top Overlay "!CS" at 6.147,21.234 h0.76; Top Overlay "RX" at 6.147,8.515 h0.76; Top Overlay "TX" at 6.147,11.055 h0.76; Bottom Overlay "TX" at 8.738,11.06 h0.76; Bottom Overlay "RX" at 8.738,8.52 h0.76; Bottom Overlay "!CS" at 8.738,21.22 h0.76; Bottom Overlay "IO1" at 8.738,5.98 h0.76; Bottom Overlay "IO2" at 8.738,3.44 h0.76; Bottom Overlay "SCK" at 8.738,18.68 h0.76; Bottom Overlay "GND" at 8.738,28.84 h0.76; Bottom Overlay "+5V" at 8.738,31.38 h0.76; Bottom Overlay "SCL" at 8.738,26.3 h0.76; Bottom Overlay "SDA" at 8.738,23.76 h0.76; Bottom Overlay "MOSI" at 8.738,13.6 h0.76; Bottom Overlay "MISO" at 8.738,16.129 h0.76; Bottom Overlay "IO0" at 2.515,3.415 h0.76; Bottom Overlay "IO1" at 2.515,5.955 h0.76; Bottom Overlay "IO2" at 2.515,8.495 h0.76; Bottom Overlay "IO3" at 2.515,11.035 h0.76; Bottom Overlay "IO4" at 2.515,13.575 h0.76; Bottom Overlay "IO5" at 2.515,16.115 h0.76; Bottom Overlay "IO6" at 2.515,18.655 h0.76; Bottom Overlay "IO7" at 2.515,21.195 h0.76; Bottom Overlay "IO8" at 2.515,23.735 h0.76; Bottom Overlay "IO9" at 2.515,26.275 h0.76
J2: Top Overlay "IO9" at 30.871,26.245 h0.76; Top Overlay "IO8" at 30.871,23.705 h0.76; Top Overlay "IO7" at 30.871,21.165 h0.76; Top Overlay "IO6" at 30.871,18.625 h0.76; Top Overlay "IO5" at 30.871,16.085 h0.76; Top Overlay "IO4" at 30.871,13.545 h0.76; Top Overlay "IO3" at 30.871,11.005 h0.76; Top Overlay "IO2" at 30.871,8.465 h0.76; Top Overlay "IO1" at 30.871,5.925 h0.76; Top Overlay "IO0" at 30.871,3.385 h0.76; Top Overlay "+5V" at 25.444,31.325 h0.76; Top Overlay "GND" at 25.444,28.785 h0.76; Top Overlay "SCL" at 25.444,26.245 h0.76; Top Overlay "SDA" at 25.444,23.705 h0.76; Top Overlay "!CS" at 25.952,21.165 h0.76; Top Overlay "SCK" at 25.444,18.625 h0.76; Top Overlay "MISO" at 24.809,16.085 h0.76; Top Overlay "MOSI" at 24.936,13.545 h0.76; Top Overlay "TX" at 26.206,11.005 h0.76; Top Overlay "RX" at 26.206,8.465 h0.76; Top Overlay "AN1" at 25.825,5.925 h0.76; Top Overlay "AN0" at 25.571,3.385 h0.76; Top Overlay "BLADE DOCK" at 24.659,1 h1.02; Bottom Overlay "AN0" at 27.459,3.4 h0.76; Bottom Overlay "AN1" at 27.484,5.925 h0.76; Bottom Overlay "RX" at 27.459,8.475 h0.76; Bottom Overlay "TX" at 27.531,10.98 h0.76; Bottom Overlay "MOSI" at 27.384,13.55 h0.76; Bottom Overlay "MISO" at 27.484,16.085 h0.76; Bottom Overlay "SCK" at 27.469,18.625 h0.76; Bottom Overlay "!CS" at 27.459,21.15 h0.76; Bottom Overlay "SDA" at 27.469,23.705 h0.76; Bottom Overlay "SCL" at 27.469,26.245 h0.76; Bottom Overlay "GND" at 27.469,28.785 h0.76; Bottom Overlay "+5V" at 27.469,31.325 h0.76; Bottom Overlay "IO0" at 32.884,3.375 h0.76; Bottom Overlay "IO1" at 32.659,5.925 h0.76; Bottom Overlay "IO2" at 32.896,8.465 h0.76; Bottom Overlay "IO3" at 32.884,11 h0.76; Bottom Overlay "IO4" at 32.884,13.575 h0.76; Bottom Overlay "IO5" at 32.896,16.085 h0.76; Bottom Overlay "IO6" at 32.896,18.625 h0.76; Bottom Overlay "IO7" at 32.896,21.165 h0.76; Bottom Overlay "IO8" at 32.896,23.705 h0.76; Bottom Overlay "IO9" at 32.896,26.245 h0.76; Mechanical 5 "BOARD EDGE" at 30.378,0.203 h0.51
J3: Top Overlay "b" at 13.625,11.727 h0.76 r180; Top Overlay "a" at 11.25,9.127 h0.76 r180
J4: Top Overlay "b" at 10.6,7.758 h0.76 r270; Top Overlay "a" at 13.2,5.383 h0.76 r270
LBL1: Top Overlay "X" at -11.943,15.561 h1.27; Bottom Overlay "X" at -11.943,12.561 h1.27; Mechanical 2 "Mechanical6" at -32.009,-17.381 h1.27; Mechanical 2 "Mechanical5" at -32.009,-14.381 h1.27; Mechanical 2 "Midlayer3" at -32.009,27.746 h1.27; Mechanical 2 "MidLayer4" at -32.009,24.746 h1.27; Mechanical 2 "MidLayer1" at -32.009,33.746 h1.27; Mechanical 2 "MidLayer2" at -32.009,30.746 h1.27; Mechanical 2 "Top Layer" at -32.009,36.746 h1.27; Mechanical 2 "Active PCB Layers" at -32.025,39.746 h1.27; Mechanical 2 "Bottom Layer" at -32.009,21.746 h1.27; Mechanical 2 "Mechanical2" at -32.009,-5.361 h1.27; Mechanical 2 "Mechanical1" at -32.009,-2.361 h1.27; Mechanical 2 "Mechanical3" at -32.009,-8.361 h1.27; Mechanical 2 "Mechanical4" at -32.009,-11.361 h1.27; Mechanical 2 "Top Overlay" at -32.009,15.662 h1.27; Mechanical 2 "Top Paste" at -32.009,9.662 h1.27; Mechanical 2 "Bottom Overlay" at -32.009,12.662 h1.27; Mechanical 2 "Bottom Paste" at -32.009,6.662 h1.27; Mechanical 2 "Top Solder" at -32.009,3.662 h1.27; Mechanical 2 "Bottom Solder" at -32.009,0.662 h1.27; Mechanical 2 "Multi-layer" at -32.009,18.512 h1.27; Mechanical 2 "Keep-Out Layer" at -32.009,-20.398 h1.27; Mechanical 2 "X" at -11.943,-5.441 h1.27; Mechanical 2 "X" at -11.943,-2.44 h1.27; Mechanical 5 "X" at -11.943,-14.441 h1.27; Top Layer "X" at -11.943,36.562 h1.27; MidLayer1 "X" at -11.943,33.562 h1.27; MidLayer2 "X" at -11.943,30.562 h1.27; MidLayer3 "X" at -11.943,27.562 h1.27; MidLayer4 "X" at -11.943,24.561 h1.27; Bottom Layer "X" at -11.943,21.561 h1.27; Top Paste "X" at -11.943,9.56 h1.27; Bottom Paste "X" at -11.943,6.56 h1.27; Top Solder "X" at -11.943,3.56 h1.27; Bottom Solder "X" at -11.943,0.56 h1.27; Keep-Out Layer "X" at -11.943,-20.441 h1.27; Mechanical 3 "X" at -11.943,-8.441 h1.27; Mechanical 4 "X" at -11.943,-11.441 h1.27; Mechanical 6 "X" at -11.943,-17.441 h1.27; Multi-Layer "X" at -11.943,18.561 h1.27
LBL2: Bottom Overlay "BXXXX-EHDW-01" at 12.808,31.512 h0.76 r90; Bottom Overlay "xxx BLADE" at 11.008,31.512 h0.76 r90; Bottom Overlay "######  YYYY-WK" at 14.608,31.512 h0.76 r90; Bottom Overlay "CURRENT LOAD: xxx mA" at 16.408,31.512 h0.76 r90
LBL4: Mechanical 2 "Title:" at -5.754,-8.241 h1.27; Mechanical 2 "PCB Name:" at -5.754,-11.241 h1.27; Mechanical 2 "Date:" at -5.754,-17.241 h1.27; Mechanical 2 "Revision:" at -5.754,-14.241 h1.27; Mechanical 2 "Author:" at -5.754,-20.241 h1.27; Mechanical 2 "<Design Name>" at 6.246,-8.241 h1.27; Mechanical 2 "<PCB NAME>" at 6.246,-11.241 h1.27; Mechanical 2 "<RXX>" at 6.246,-14.241 h1.27; Mechanical 2 "<YYYY-MM-DD>" at 6.246,-17.241 h1.27; Mechanical 2 "JRL" at 6.246,-20.241 h1.27
U2: Top Overlay "x" at 19.482,15.316 h0.51; Top Overlay "z" at 17.286,15.316 h0.51; Top Overlay "y" at 18.618,14.478 h0.51; Top Overlay "1" at 16.154,14.275 h0.51